# EAGLE board sensor-panel (EAGLE 6.3)
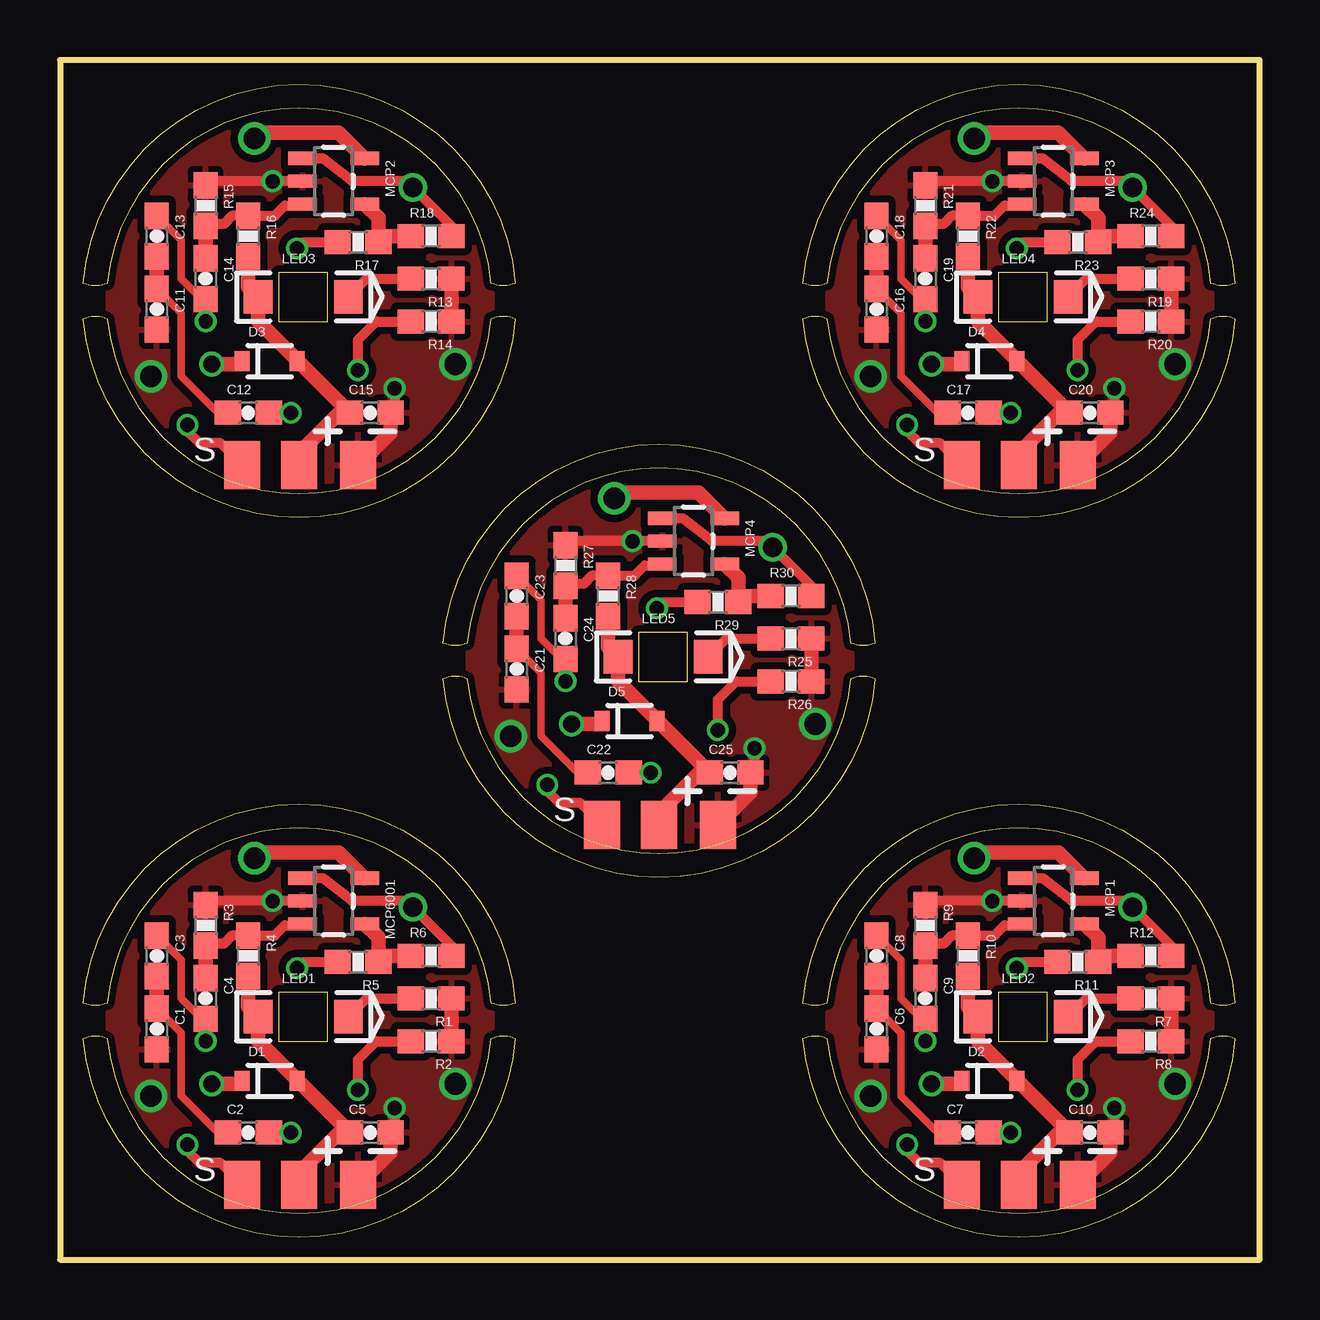
[diagram p0: board, top side]
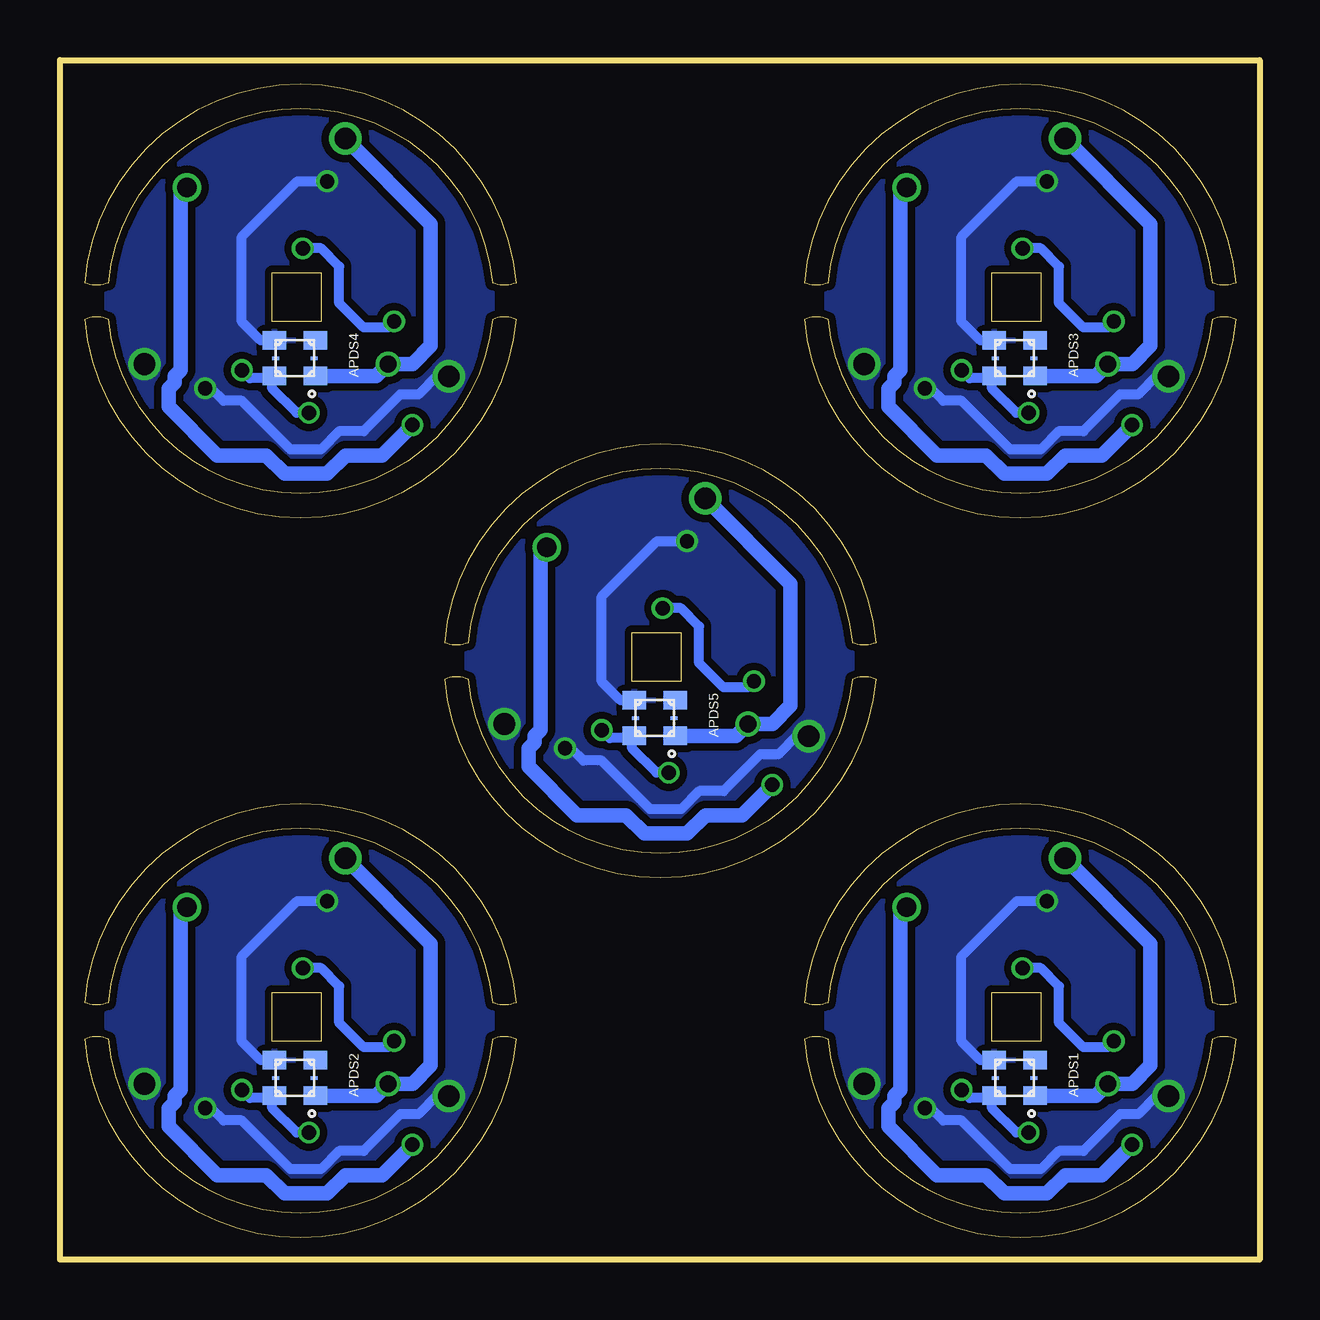
[diagram p1: board, bottom side, seen from below]

Size 50 x 50 mm. Coordinates in mm from the lower left corner, seen from the top.
Outline: 0,0 50,0 50,50 0,50 0,0
Outline: 1.98,9.21 arc169 17.98,9.21 arc-44 18.98,9.21 arc-170 0.98,9.21 arc-44 1.98,9.21
Outline: 17.98,10.71 arc169 1.98,10.71 arc-44 0.98,10.71 arc-170 18.98,10.71 arc-44 17.98,10.71
Outline: 9.12,11.13 9.12,9.1 11.15,9.1 11.15,11.13 9.12,11.13
Outline: 31.98,9.21 arc169 47.98,9.21 arc-44 48.98,9.21 arc-170 30.98,9.21 arc-44 31.98,9.21
Outline: 47.98,10.71 arc169 31.98,10.71 arc-44 30.98,10.71 arc-170 48.98,10.71 arc-44 47.98,10.71
Outline: 39.12,11.13 39.12,9.1 41.15,9.1 41.15,11.13 39.12,11.13
Outline: 1.98,39.21 arc169 17.98,39.21 arc-44 18.98,39.21 arc-170 0.98,39.21 arc-44 1.98,39.21
Outline: 17.98,40.71 arc169 1.98,40.71 arc-44 0.98,40.71 arc-170 18.98,40.71 arc-44 17.98,40.71
Outline: 9.12,41.13 9.12,39.1 11.15,39.1 11.15,41.13 9.12,41.13
Outline: 31.98,39.21 arc169 47.98,39.21 arc-44 48.98,39.21 arc-170 30.98,39.21 arc-44 31.98,39.21
Outline: 47.98,40.71 arc169 31.98,40.71 arc-44 30.98,40.71 arc-170 48.98,40.71 arc-44 47.98,40.71
Outline: 39.12,41.13 39.12,39.1 41.15,39.1 41.15,41.13 39.12,41.13
Outline: 16.98,24.21 arc169 32.98,24.21 arc-44 33.98,24.21 arc-170 15.98,24.21 arc-44 16.98,24.21
Outline: 32.98,25.71 arc169 16.98,25.71 arc-44 15.98,25.71 arc-170 33.98,25.71 arc-44 32.98,25.71
Outline: 24.12,26.13 24.12,24.1 26.15,24.1 26.15,26.13 24.12,26.13
Copper layers (1*16): Top 0.035mm / dielectric 1.5mm / Bottom 0.035mm
Design rules "ITead_rule-8mil": minimum track width 8mil, minimum drill 0.3mm, track to track 8mil, track to pad 8mil, pad to pad 8mil, via to via 8mil, smd to smd 0mil, copper to edge 10mil, drill to drill 10mil, minimum pad ring 10mil, minimum via ring 6mil, stop-mask expansion 2mil, vias tented up to drill 100mil, thermal gap 10mil

## Footprints (pad centres in the part's own frame; a part is rotated, then mirrored left to right if it is on the bottom)
MINIATURE-CHIPLED = smd 0.762 x 1.016: P$1 0.76,0.807; P$3 -0.721,0.807; P$4 -0.721,-0.893; P$6 0.76,-0.893 | smd 0.152 x 0.305: P$2 0.02,0.757; P$5 0.02,-0.843
0603-CAP = smd 1.1 x 1: 1 -0.85,0; 2 0.85,0
SOD-323 = smd 0.63 x 0.83: 1 -1.15,0; 2 1.15,0
PAD-1.5X4.5 = smd 1.5 x 2: P$1 0,0
LED-1206-REVERSE-MOUNT = smd 1.2 x 1.4: A -1.881,0; C 1.881,0
SOT23-5 = smd 0.55 x 1.2: 1 -0.95,-1.3; 2 0,-1.3; 3 0.95,-1.3; 4 0.95,1.3; 5 -0.95,1.3
0603-RES = smd 1.1 x 1: 1 -0.85,0; 2 0.85,0

## Placement (x,y rotation side)
APDS1  [MINIATURE-CHIPLED]  10.16,7.59 270 bottom
APDS2  [MINIATURE-CHIPLED]  40.16,7.59 270 bottom
APDS3  [MINIATURE-CHIPLED]  10.16,37.59 270 bottom
APDS4  [MINIATURE-CHIPLED]  40.16,37.59 270 bottom
APDS5  [MINIATURE-CHIPLED]  25.16,22.59 270 bottom
C1  4.7uF  [0603-CAP]  4.04,9.61 270 top
C2  4.7uF  [0603-CAP]  7.85,5.29 0 top
C3  4.7uF  [0603-CAP]  4.04,12.66 270 top
C4  2.2uF  [0603-CAP]  6.07,10.88 270 top
C5  2.2uF  [0603-CAP]  12.93,5.29 0 top
C6  4.7uF  [0603-CAP]  34.04,9.61 270 top
C7  4.7uF  [0603-CAP]  37.85,5.29 0 top
C8  4.7uF  [0603-CAP]  34.04,12.66 270 top
C9  2.2uF  [0603-CAP]  36.07,10.88 270 top
C10  2.2uF  [0603-CAP]  42.93,5.29 0 top
C11  4.7uF  [0603-CAP]  4.04,39.61 270 top
C12  4.7uF  [0603-CAP]  7.85,35.29 0 top
C13  4.7uF  [0603-CAP]  4.04,42.66 270 top
C14  2.2uF  [0603-CAP]  6.07,40.88 270 top
C15  2.2uF  [0603-CAP]  12.93,35.29 0 top
C16  4.7uF  [0603-CAP]  34.04,39.61 270 top
C17  4.7uF  [0603-CAP]  37.85,35.29 0 top
C18  4.7uF  [0603-CAP]  34.04,42.66 270 top
C19  2.2uF  [0603-CAP]  36.07,40.88 270 top
C20  2.2uF  [0603-CAP]  42.93,35.29 0 top
C21  4.7uF  [0603-CAP]  19.04,24.61 270 top
C22  4.7uF  [0603-CAP]  22.85,20.29 0 top
C23  4.7uF  [0603-CAP]  19.04,27.66 270 top
C24  2.2uF  [0603-CAP]  21.07,25.88 270 top
C25  2.2uF  [0603-CAP]  27.93,20.29 0 top
D1  BAT20JFILM  [SOD-323]  8.74,7.45 0 top
D2  BAT20JFILM  [SOD-323]  38.74,7.45 0 top
D3  BAT20JFILM  [SOD-323]  8.74,37.45 0 top
D4  BAT20JFILM  [SOD-323]  38.74,37.45 0 top
D5  BAT20JFILM  [SOD-323]  23.74,22.45 0 top
GND1  M01SMD-4.5X1.5  [PAD-1.5X4.5]  12.42,3.11 0 top
GND2  M01SMD-4.5X1.5  [PAD-1.5X4.5]  42.42,3.11 0 top
GND3  M01SMD-4.5X1.5  [PAD-1.5X4.5]  12.42,33.11 0 top
GND4  M01SMD-4.5X1.5  [PAD-1.5X4.5]  42.42,33.11 0 top
GND5  M01SMD-4.5X1.5  [PAD-1.5X4.5]  27.42,18.11 0 top
LED1  [LED-1206-REVERSE-MOUNT]  10.14,10.12 0 top
LED2  [LED-1206-REVERSE-MOUNT]  40.14,10.12 0 top
LED3  [LED-1206-REVERSE-MOUNT]  10.14,40.12 0 top
LED4  [LED-1206-REVERSE-MOUNT]  40.14,40.12 0 top
LED5  [LED-1206-REVERSE-MOUNT]  25.14,25.12 0 top
MCP1  OPA344  [SOT23-5]  41.41,14.94 270 top
MCP2  OPA344  [SOT23-5]  11.41,44.94 270 top
MCP3  OPA344  [SOT23-5]  41.41,44.94 270 top
MCP4  OPA344  [SOT23-5]  26.41,29.94 270 top
MCP6001  OPA344  [SOT23-5]  11.41,14.94 270 top
OUT1  M01SMD-4.5X1.5  [PAD-1.5X4.5]  7.6,3.11 0 top
OUT2  M01SMD-4.5X1.5  [PAD-1.5X4.5]  37.6,3.11 0 top
OUT3  M01SMD-4.5X1.5  [PAD-1.5X4.5]  7.6,33.11 0 top
OUT4  M01SMD-4.5X1.5  [PAD-1.5X4.5]  37.6,33.11 0 top
OUT5  M01SMD-4.5X1.5  [PAD-1.5X4.5]  22.6,18.11 0 top
R1  470  [0603-RES]  15.47,10.88 180 top
R2  12K  [0603-RES]  15.47,9.1 180 top
R3  100K  [0603-RES]  6.07,13.93 270 top
R4  100K  [0603-RES]  7.85,12.66 270 top
R5  10K  [0603-RES]  12.42,12.4 180 top
R6  3.3M  [0603-RES]  15.47,12.66 0 top
R7  470  [0603-RES]  45.47,10.88 180 top
R8  12K  [0603-RES]  45.47,9.1 180 top
R9  100K  [0603-RES]  36.07,13.93 270 top
R10  100K  [0603-RES]  37.85,12.66 270 top
R11  10K  [0603-RES]  42.42,12.4 180 top
R12  3.3M  [0603-RES]  45.47,12.66 0 top
R13  470  [0603-RES]  15.47,40.88 180 top
R14  12K  [0603-RES]  15.47,39.1 180 top
R15  100K  [0603-RES]  6.07,43.93 270 top
R16  100K  [0603-RES]  7.85,42.66 270 top
R17  10K  [0603-RES]  12.42,42.4 180 top
R18  3.3M  [0603-RES]  15.47,42.66 0 top
R19  470  [0603-RES]  45.47,40.88 180 top
R20  12K  [0603-RES]  45.47,39.1 180 top
R21  100K  [0603-RES]  36.07,43.93 270 top
R22  100K  [0603-RES]  37.85,42.66 270 top
R23  10K  [0603-RES]  42.42,42.4 180 top
R24  3.3M  [0603-RES]  45.47,42.66 0 top
R25  470  [0603-RES]  30.47,25.88 180 top
R26  12K  [0603-RES]  30.47,24.1 180 top
R27  100K  [0603-RES]  21.07,28.93 270 top
R28  100K  [0603-RES]  22.85,27.66 270 top
R29  10K  [0603-RES]  27.42,27.4 180 top
R30  3.3M  [0603-RES]  30.47,27.66 0 top
VCC1  M01SMD-4.5X1.5  [PAD-1.5X4.5]  9.98,3.11 0 top
VCC2  M01SMD-4.5X1.5  [PAD-1.5X4.5]  39.98,3.11 0 top
VCC3  M01SMD-4.5X1.5  [PAD-1.5X4.5]  9.98,33.11 0 top
VCC4  M01SMD-4.5X1.5  [PAD-1.5X4.5]  39.98,33.11 0 top
VCC5  M01SMD-4.5X1.5  [PAD-1.5X4.5]  24.98,18.11 0 top

## Library data of the parts
APDS1-APDS5 LED1-LED5 = librae
C1-C25 = SparkFun-Capacitors; PROD_ID: CAP-00868; VALUE: 1.0uF
D1-D5 = SparkFun-DiscreteSemi; PROD_ID: DIO-11623
GND1-GND5 OUT1-OUT5 VCC1-VCC5 = SparkFun-Connectors
MCP1-MCP4 MCP6001 = SparkFun-AnalogIC
R1-R4 R6-R10 R12-R16 R18-R22 R24-R28 R30 = SparkFun-Resistors; PROD_ID: RES-00824; VALUE: 10K
R5 R11 R17 R23 R29 = SparkFun-Resistors; PROD_ID: RES-00824

## Nets
GND: APDS1.P$4 C1.2 C5.2 GND1.P$1 MCP6001.2 R1.1 R2.1 R3.1
GND1: APDS2.P$4 C6.2 C10.2 GND2.P$1 MCP1.2 R7.1 R8.1 R9.1
GND2: APDS3.P$4 C11.2 C15.2 GND3.P$1 MCP2.2 R13.1 R14.1 R15.1
GND3: APDS4.P$4 C16.2 C20.2 GND4.P$1 MCP3.2 R19.1 R20.1 R21.1
GND4: APDS5.P$4 C21.2 C25.2 GND5.P$1 MCP4.2 R25.1 R26.1 R27.1
N$1: LED2.C R7.2
N$2: APDS2.P$6 C7.2 R8.2
N$3: LED1.C R1.2
N$4: C6.1 C7.1 C8.2
N$5: C8.1 C9.2 R11.2
N$6: MCP6001.4 R5.1 R6.1
N$7: APDS1.P$6 C2.2 R2.2
N$8: C1.1 C2.1 C3.2
N$9: C3.1 C4.2 R5.2
N$10: C4.1 MCP6001.3 R3.2 R4.1
N$11: C9.1 MCP1.3 R9.2 R10.1
N$12: MCP1.4 R11.1 R12.1
N$13: LED3.C R13.2
N$14: APDS3.P$6 C12.2 R14.2
N$15: C11.1 C12.1 C13.2
N$16: C13.1 C14.2 R17.2
N$17: C14.1 MCP2.3 R15.2 R16.1
N$18: MCP2.4 R17.1 R18.1
N$19: LED4.C R19.2
N$20: APDS4.P$6 C17.2 R20.2
N$21: C16.1 C17.1 C18.2
N$22: C18.1 C19.2 R23.2
N$23: C19.1 MCP3.3 R21.2 R22.1
N$24: MCP3.4 R23.1 R24.1
N$25: LED5.C R25.2
N$26: APDS5.P$6 C22.2 R26.2
N$27: C21.1 C22.1 C23.2
N$28: C23.1 C24.2 R29.2
N$29: C24.1 MCP4.3 R27.2 R28.1
N$30: MCP4.4 R29.1 R30.1
OUT: MCP6001.1 OUT1.P$1 R6.2
OUT1: MCP1.1 OUT2.P$1 R12.2
OUT2: MCP2.1 OUT3.P$1 R18.2
OUT3: MCP3.1 OUT4.P$1 R24.2
OUT4: MCP4.1 OUT5.P$1 R30.2
VCC: C5.1 D1.2 LED1.A R4.2 VCC1.P$1
VCC1: C10.1 D2.2 LED2.A R10.2 VCC2.P$1
VCC2: C15.1 D3.2 LED3.A R16.2 VCC3.P$1
VCC3: C20.1 D4.2 LED4.A R22.2 VCC4.P$1
VCC4: C25.1 D5.2 LED5.A R28.2 VCC5.P$1
VDD: APDS1.P$1 D1.1 MCP6001.5
VDD1: APDS2.P$1 D2.1 MCP1.5
VDD2: APDS3.P$1 D3.1 MCP2.5
VDD3: APDS4.P$1 D4.1 MCP3.5
VDD4: APDS5.P$1 D5.1 MCP4.5

## Tracks (layer width: path | path; a pad name or v marks a point on that pad's centre or on a via)
GND  (via drill 0.6, 0.9)
  Top 0.406: 6.16,14.69 R3.1 6.07,14.94 v8.87,14.94 MCP6001.2 | v13.95,6.31 13.95,5.55 13.69,5.29
  Top 0.61: GND1.P$1 13.78,4.47 C5.2 | R1.1 R2.1
  Bottom 0.406: v8.87,14.94 MCP6001.2 12.42,12.63 12.42,9.1 11.63,8.31 APDS1.P$4 | v3.79,6.82 4.29,6.82 5.06,6.05 5.82,6.05 7.34,4.53 8.36,4.53 9.12,3.77 10.39,3.77 12.42,5.8 13.18,5.8 13.69,6.31 v13.95,6.31
  other vias: 16.49,7.32
  pour Top (isolate 0.305): 2.01,17.99 2.01,1.99 18.01,1.99 18.01,17.99
  pour Bottom (isolate 0.305): 2.01,17.99 2.01,1.99 18.01,1.99 18.01,17.99 2.26,17.99
GND1  (via drill 0.6, 0.9)
  Top 0.406: 36.16,14.69 R9.1 36.07,14.94 v38.87,14.94 MCP1.2 | v43.95,6.31 43.95,5.55 43.69,5.29
  Top 0.61: GND2.P$1 43.78,4.47 C10.2 | R7.1 R8.1
  Bottom 0.406: v38.87,14.94 MCP1.2 42.42,12.63 42.42,9.1 41.63,8.31 APDS2.P$4 | v33.79,6.82 34.29,6.82 35.06,6.05 35.82,6.05 37.34,4.53 38.36,4.53 39.12,3.77 40.39,3.77 42.42,5.8 43.18,5.8 43.69,6.31 v43.95,6.31
  other vias: 46.49,7.32
  pour Top (isolate 0.305): 32.01,17.99 32.01,1.99 48.01,1.99 48.01,17.99
  pour Bottom (isolate 0.305): 32.01,17.99 32.01,1.99 48.01,1.99 48.01,17.99 32.26,17.99
GND2  (via drill 0.6, 0.9)
  Top 0.406: 6.16,44.69 R15.1 6.07,44.94 v8.87,44.94 MCP2.2 | v13.95,36.31 13.95,35.55 13.69,35.29
  Top 0.61: GND3.P$1 13.78,34.47 C15.2 | R13.1 R14.1
  Bottom 0.406: v8.87,44.94 MCP2.2 12.42,42.63 12.42,39.1 11.63,38.31 APDS3.P$4 | v3.79,36.82 4.29,36.82 5.06,36.05 5.82,36.05 7.34,34.53 8.36,34.53 9.12,33.77 10.39,33.77 12.42,35.8 13.18,35.8 13.69,36.31 v13.95,36.31
  other vias: 16.49,37.32
  pour Top (isolate 0.305): 2.01,47.99 2.01,31.99 18.01,31.99 18.01,47.99
  pour Bottom (isolate 0.305): 2.01,47.99 2.01,31.99 18.01,31.99 18.01,47.99 2.26,47.99
GND3  (via drill 0.6, 0.9)
  Top 0.406: 36.16,44.69 R21.1 36.07,44.94 v38.87,44.94 MCP3.2 | v43.95,36.31 43.95,35.55 43.69,35.29
  Top 0.61: GND4.P$1 43.78,34.47 C20.2 | R19.1 R20.1
  Bottom 0.406: v38.87,44.94 MCP3.2 42.42,42.63 42.42,39.1 41.63,38.31 APDS4.P$4 | v33.79,36.82 34.29,36.82 35.06,36.05 35.82,36.05 37.34,34.53 38.36,34.53 39.12,33.77 40.39,33.77 42.42,35.8 43.18,35.8 43.69,36.31 v43.95,36.31
  other vias: 46.49,37.32
  pour Top (isolate 0.305): 32.01,47.99 32.01,31.99 48.01,31.99 48.01,47.99
  pour Bottom (isolate 0.305): 32.01,47.99 32.01,31.99 48.01,31.99 48.01,47.99 32.26,47.99
GND4  (via drill 0.6, 0.9)
  Top 0.406: 21.16,29.69 R27.1 21.07,29.94 v23.87,29.94 MCP4.2 | v28.95,21.31 28.95,20.55 28.69,20.29
  Top 0.61: GND5.P$1 28.78,19.47 C25.2 | R25.1 R26.1
  Bottom 0.406: v23.87,29.94 MCP4.2 27.42,27.63 27.42,24.1 26.63,23.31 APDS5.P$4 | v18.79,21.82 19.29,21.82 20.06,21.05 20.82,21.05 22.34,19.53 23.36,19.53 24.12,18.77 25.39,18.77 27.42,20.8 28.18,20.8 28.69,21.31 v28.95,21.31
  other vias: 31.49,22.32
  pour Top (isolate 0.305): 17.01,32.99 17.01,16.99 33.01,16.99 33.01,32.99
  pour Bottom (isolate 0.305): 17.01,32.99 17.01,16.99 33.01,16.99 33.01,32.99 17.26,32.99
N$1
  Top 0.406: LED2.C 42.78,10.88 R7.2
N$2  (via drill 0.6)
  Top 0.406: v39.63,5.29 C7.2 | v42.42,7.07 42.42,8.34 43.18,9.1 R8.2
  Bottom 0.406: v39.63,5.29 40.14,5.29 41.15,6.31 41.15,6.73 | 41.15,6.73 APDS2.P$6 | 41.15,6.73 42.09,6.73 v42.42,7.07
N$3
  Top 0.406: LED1.C 12.78,10.88 R1.2
N$4
  Top 0.305: C6.1 35.06,9.44 35.06,6.82 36.58,5.29 C7.1
  Top 0.61: C6.1 C8.2
N$5  (via drill 0.6)
  Top 0.305: C8.1 35.06,12.49 35.06,10.88 35.91,10.03 C9.2
  Top 0.406: C9.2 v36.07,9.1 | v39.88,12.15 40.14,12.4 R11.2
  Bottom 0.406: v36.07,9.1 36.33,8.85 37.34,8.85 38.36,9.86 38.36,11.39 39.12,12.15 v39.88,12.15
N$6
  Top 0.61: R6.1 13.53,12.66 R5.1 13.27,13.43 MCP6001.4
N$7  (via drill 0.6)
  Top 0.406: v9.63,5.29 C2.2 | v12.42,7.07 12.42,8.34 13.18,9.1 R2.2
  Bottom 0.406: v9.63,5.29 10.14,5.29 11.15,6.31 11.15,6.73 | 11.15,6.73 APDS1.P$6 | 11.15,6.73 12.09,6.73 v12.42,7.07
N$8
  Top 0.305: C1.1 5.06,9.44 5.06,6.82 6.58,5.29 C2.1
  Top 0.61: C1.1 C3.2
N$9  (via drill 0.6)
  Top 0.305: C3.1 5.06,12.49 5.06,10.88 5.91,10.03 C4.2
  Top 0.406: C4.2 v6.07,9.1 | v9.88,12.15 10.14,12.4 R5.2
  Bottom 0.406: v6.07,9.1 6.33,8.85 7.34,8.85 8.36,9.86 8.36,11.39 9.12,12.15 v9.88,12.15
N$10
  Top 0.406: R3.2 6.16,13.17 6.83,13.17 7.18,13.51 R4.1 8.95,13.51 9.37,13.93 10.04,13.93 MCP6001.3
  Top 0.61: R3.2 C4.1
N$11
  Top 0.406: R9.2 36.16,13.17 36.83,13.17 37.18,13.51 R10.1 38.95,13.51 39.37,13.93 40.04,13.93 MCP1.3
  Top 0.61: R9.2 C9.1
N$12
  Top 0.61: R12.1 43.53,12.66 R11.1 43.27,13.43 MCP1.4
N$13
  Top 0.406: LED3.C 12.78,40.88 R13.2
N$14  (via drill 0.6)
  Top 0.406: v9.63,35.29 C12.2 | v12.42,37.07 12.42,38.34 13.18,39.1 R14.2
  Bottom 0.406: v9.63,35.29 10.14,35.29 11.15,36.31 11.15,36.73 | 11.15,36.73 APDS3.P$6 | 11.15,36.73 12.09,36.73 v12.42,37.07
N$15
  Top 0.305: C11.1 5.06,39.44 5.06,36.82 6.58,35.29 C12.1
  Top 0.61: C11.1 C13.2
N$16  (via drill 0.6)
  Top 0.305: C13.1 5.06,42.49 5.06,40.88 5.91,40.03 C14.2
  Top 0.406: C14.2 v6.07,39.1 | v9.88,42.15 10.14,42.4 R17.2
  Bottom 0.406: v6.07,39.1 6.33,38.85 7.34,38.85 8.36,39.86 8.36,41.39 9.12,42.15 v9.88,42.15
N$17
  Top 0.406: R15.2 6.16,43.17 6.83,43.17 7.18,43.51 R16.1 8.95,43.51 9.37,43.93 10.04,43.93 MCP2.3
  Top 0.61: R15.2 C14.1
N$18
  Top 0.61: R18.1 13.53,42.66 R17.1 13.27,43.43 MCP2.4
N$19
  Top 0.406: LED4.C 42.78,40.88 R19.2
N$20  (via drill 0.6)
  Top 0.406: v39.63,35.29 C17.2 | v42.42,37.07 42.42,38.34 43.18,39.1 R20.2
  Bottom 0.406: v39.63,35.29 40.14,35.29 41.15,36.31 41.15,36.73 | 41.15,36.73 APDS4.P$6 | 41.15,36.73 42.09,36.73 v42.42,37.07
N$21
  Top 0.305: C16.1 35.06,39.44 35.06,36.82 36.58,35.29 C17.1
  Top 0.61: C16.1 C18.2
N$22  (via drill 0.6)
  Top 0.305: C18.1 35.06,42.49 35.06,40.88 35.91,40.03 C19.2
  Top 0.406: C19.2 v36.07,39.1 | v39.88,42.15 40.14,42.4 R23.2
  Bottom 0.406: v36.07,39.1 36.33,38.85 37.34,38.85 38.36,39.86 38.36,41.39 39.12,42.15 v39.88,42.15
N$23
  Top 0.406: R21.2 36.16,43.17 36.83,43.17 37.18,43.51 R22.1 38.95,43.51 39.37,43.93 40.04,43.93 MCP3.3
  Top 0.61: R21.2 C19.1
N$24
  Top 0.61: R24.1 43.53,42.66 R23.1 43.27,43.43 MCP3.4
N$25
  Top 0.406: LED5.C 27.78,25.88 R25.2
N$26  (via drill 0.6)
  Top 0.406: v24.63,20.29 C22.2 | v27.42,22.07 27.42,23.34 28.18,24.1 R26.2
  Bottom 0.406: v24.63,20.29 25.14,20.29 26.15,21.31 26.15,21.73 | 26.15,21.73 APDS5.P$6 | 26.15,21.73 27.09,21.73 v27.42,22.07
N$27
  Top 0.305: C21.1 20.06,24.44 20.06,21.82 21.58,20.29 C22.1
  Top 0.61: C21.1 C23.2
N$28  (via drill 0.6)
  Top 0.305: C23.1 20.06,27.49 20.06,25.88 20.91,25.03 C24.2
  Top 0.406: C24.2 v21.07,24.1 | v24.88,27.15 25.14,27.4 R29.2
  Bottom 0.406: v21.07,24.1 21.33,23.85 22.34,23.85 23.36,24.86 23.36,26.39 24.12,27.15 v24.88,27.15
N$29
  Top 0.406: R27.2 21.16,28.17 21.83,28.17 22.18,28.51 R28.1 23.95,28.51 24.37,28.93 25.04,28.93 MCP4.3
  Top 0.61: R27.2 C24.1
N$30
  Top 0.61: R30.1 28.53,27.66 R29.1 28.27,28.43 MCP4.4
OUT  (via drill 0.6, 0.8)
  Top 0.406: OUT1.P$1 6.69,4.02 5.82,4.02 5.31,4.53 v5.31,4.78 | MCP6001.1 10.96,15.89 12.17,14.94 14.45,14.94 v14.71,14.69 16.32,13.08 R6.2
  Bottom 0.61: v5.31,4.78 6.58,3.51 8.1,3.51 8.87,2.75 10.64,2.75 11.41,3.51 13.44,3.51 15.47,5.55 15.47,6.31 15.22,6.56 15.22,6.82 14.96,7.07 14.96,14.44 v14.71,14.69
OUT1  (via drill 0.6, 0.8)
  Top 0.406: OUT2.P$1 36.69,4.02 35.82,4.02 35.31,4.53 v35.31,4.78 | MCP1.1 40.96,15.89 42.17,14.94 44.45,14.94 v44.71,14.69 46.32,13.08 R12.2
  Bottom 0.61: v35.31,4.78 36.58,3.51 38.1,3.51 38.87,2.75 40.64,2.75 41.41,3.51 43.44,3.51 45.47,5.55 45.47,6.31 45.22,6.56 45.22,6.82 44.96,7.07 44.96,14.44 v44.71,14.69
OUT2  (via drill 0.6, 0.8)
  Top 0.406: OUT3.P$1 6.69,34.02 5.82,34.02 5.31,34.53 v5.31,34.78 | MCP2.1 10.96,45.89 12.17,44.94 14.45,44.94 v14.71,44.69 16.32,43.08 R18.2
  Bottom 0.61: v5.31,34.78 6.58,33.51 8.1,33.51 8.87,32.75 10.64,32.75 11.41,33.51 13.44,33.51 15.47,35.55 15.47,36.31 15.22,36.56 15.22,36.82 14.96,37.07 14.96,44.44 v14.71,44.69
OUT3  (via drill 0.6, 0.8)
  Top 0.406: OUT4.P$1 36.69,34.02 35.82,34.02 35.31,34.53 v35.31,34.78 | MCP3.1 40.96,45.89 42.17,44.94 44.45,44.94 v44.71,44.69 46.32,43.08 R24.2
  Bottom 0.61: v35.31,34.78 36.58,33.51 38.1,33.51 38.87,32.75 40.64,32.75 41.41,33.51 43.44,33.51 45.47,35.55 45.47,36.31 45.22,36.56 45.22,36.82 44.96,37.07 44.96,44.44 v44.71,44.69
OUT4  (via drill 0.6, 0.8)
  Top 0.406: OUT5.P$1 21.69,19.02 20.82,19.02 20.31,19.53 v20.31,19.78 | MCP4.1 25.96,30.89 27.17,29.94 29.45,29.94 v29.71,29.69 31.32,28.08 R30.2
  Bottom 0.61: v20.31,19.78 21.58,18.51 23.1,18.51 23.87,17.75 25.64,17.75 26.41,18.51 28.44,18.51 30.47,20.55 30.47,21.31 30.22,21.56 30.22,21.82 29.96,22.07 29.96,29.44 v29.71,29.69
VCC
  Top 0.61: VCC1.P$1 9.98,3.61 11.66,5.29 C5.1 9.89,7.48 | 9.89,7.48 8.26,9.12 LED1.A 7.85,10.52 R4.2 | D1.2 9.89,7.48
VCC1
  Top 0.61: VCC2.P$1 39.98,3.61 41.66,5.29 C10.1 39.89,7.48 | 39.89,7.48 38.26,9.12 LED2.A 37.85,10.52 R10.2 | D2.2 39.89,7.48
VCC2
  Top 0.61: VCC3.P$1 9.98,33.61 11.66,35.29 C15.1 9.89,37.48 | 9.89,37.48 8.26,39.12 LED3.A 7.85,40.52 R16.2 | D3.2 9.89,37.48
VCC3
  Top 0.61: VCC4.P$1 39.98,33.61 41.66,35.29 C20.1 39.89,37.48 | 39.89,37.48 38.26,39.12 LED4.A 37.85,40.52 R22.2 | D4.2 39.89,37.48
VCC4
  Top 0.61: VCC5.P$1 24.98,18.61 26.66,20.29 C25.1 24.89,22.48 | 24.89,22.48 23.25,24.12 LED5.A 22.85,25.52 R28.2 | D5.2 24.89,22.48
VDD  (via drill 0.7, 0.9)
  Top 0.61: v6.33,7.32 7.46,7.32 D1.1 | MCP6001.5 11.62,16.98 8.36,16.98 v8.1,16.72
  Bottom 0.61: APDS1.P$1 6.82,6.83 v6.33,7.32 5.31,7.32 4.55,8.09 4.55,13.17 v8.1,16.72
VDD1  (via drill 0.7, 0.9)
  Top 0.61: v36.33,7.32 37.46,7.32 D2.1 | MCP1.5 41.62,16.98 38.36,16.98 v38.1,16.72
  Bottom 0.61: APDS2.P$1 36.82,6.83 v36.33,7.32 35.31,7.32 34.55,8.09 34.55,13.17 v38.1,16.72
VDD2  (via drill 0.7, 0.9)
  Top 0.61: v6.33,37.32 7.46,37.32 D3.1 | MCP2.5 11.62,46.98 8.36,46.98 v8.1,46.72
  Bottom 0.61: APDS3.P$1 6.82,36.83 v6.33,37.32 5.31,37.32 4.55,38.09 4.55,43.17 v8.1,46.72
VDD3  (via drill 0.7, 0.9)
  Top 0.61: v36.33,37.32 37.46,37.32 D4.1 | MCP3.5 41.62,46.98 38.36,46.98 v38.1,46.72
  Bottom 0.61: APDS4.P$1 36.82,36.83 v36.33,37.32 35.31,37.32 34.55,38.09 34.55,43.17 v38.1,46.72
VDD4  (via drill 0.7, 0.9)
  Top 0.61: v21.33,22.32 22.46,22.32 D5.1 | MCP4.5 26.62,31.98 23.36,31.98 v23.1,31.72
  Bottom 0.61: APDS5.P$1 21.82,21.83 v21.33,22.32 20.31,22.32 19.55,23.09 19.55,28.17 v23.1,31.72

## Text on the board
tPlace: S | S | S | S | S